# Altium PCB DGCtrl.PcbDoc (part 2 of 3)
Units mm, origin at the board's own origin, x right, y up, seen from the top; angles counter-clockwise.
Board outline 197.61 x 87.2 mm, 2 copper layers (Top Layer, Bottom Layer); 304 components, 306 nets, 985 pads, 136 vias.
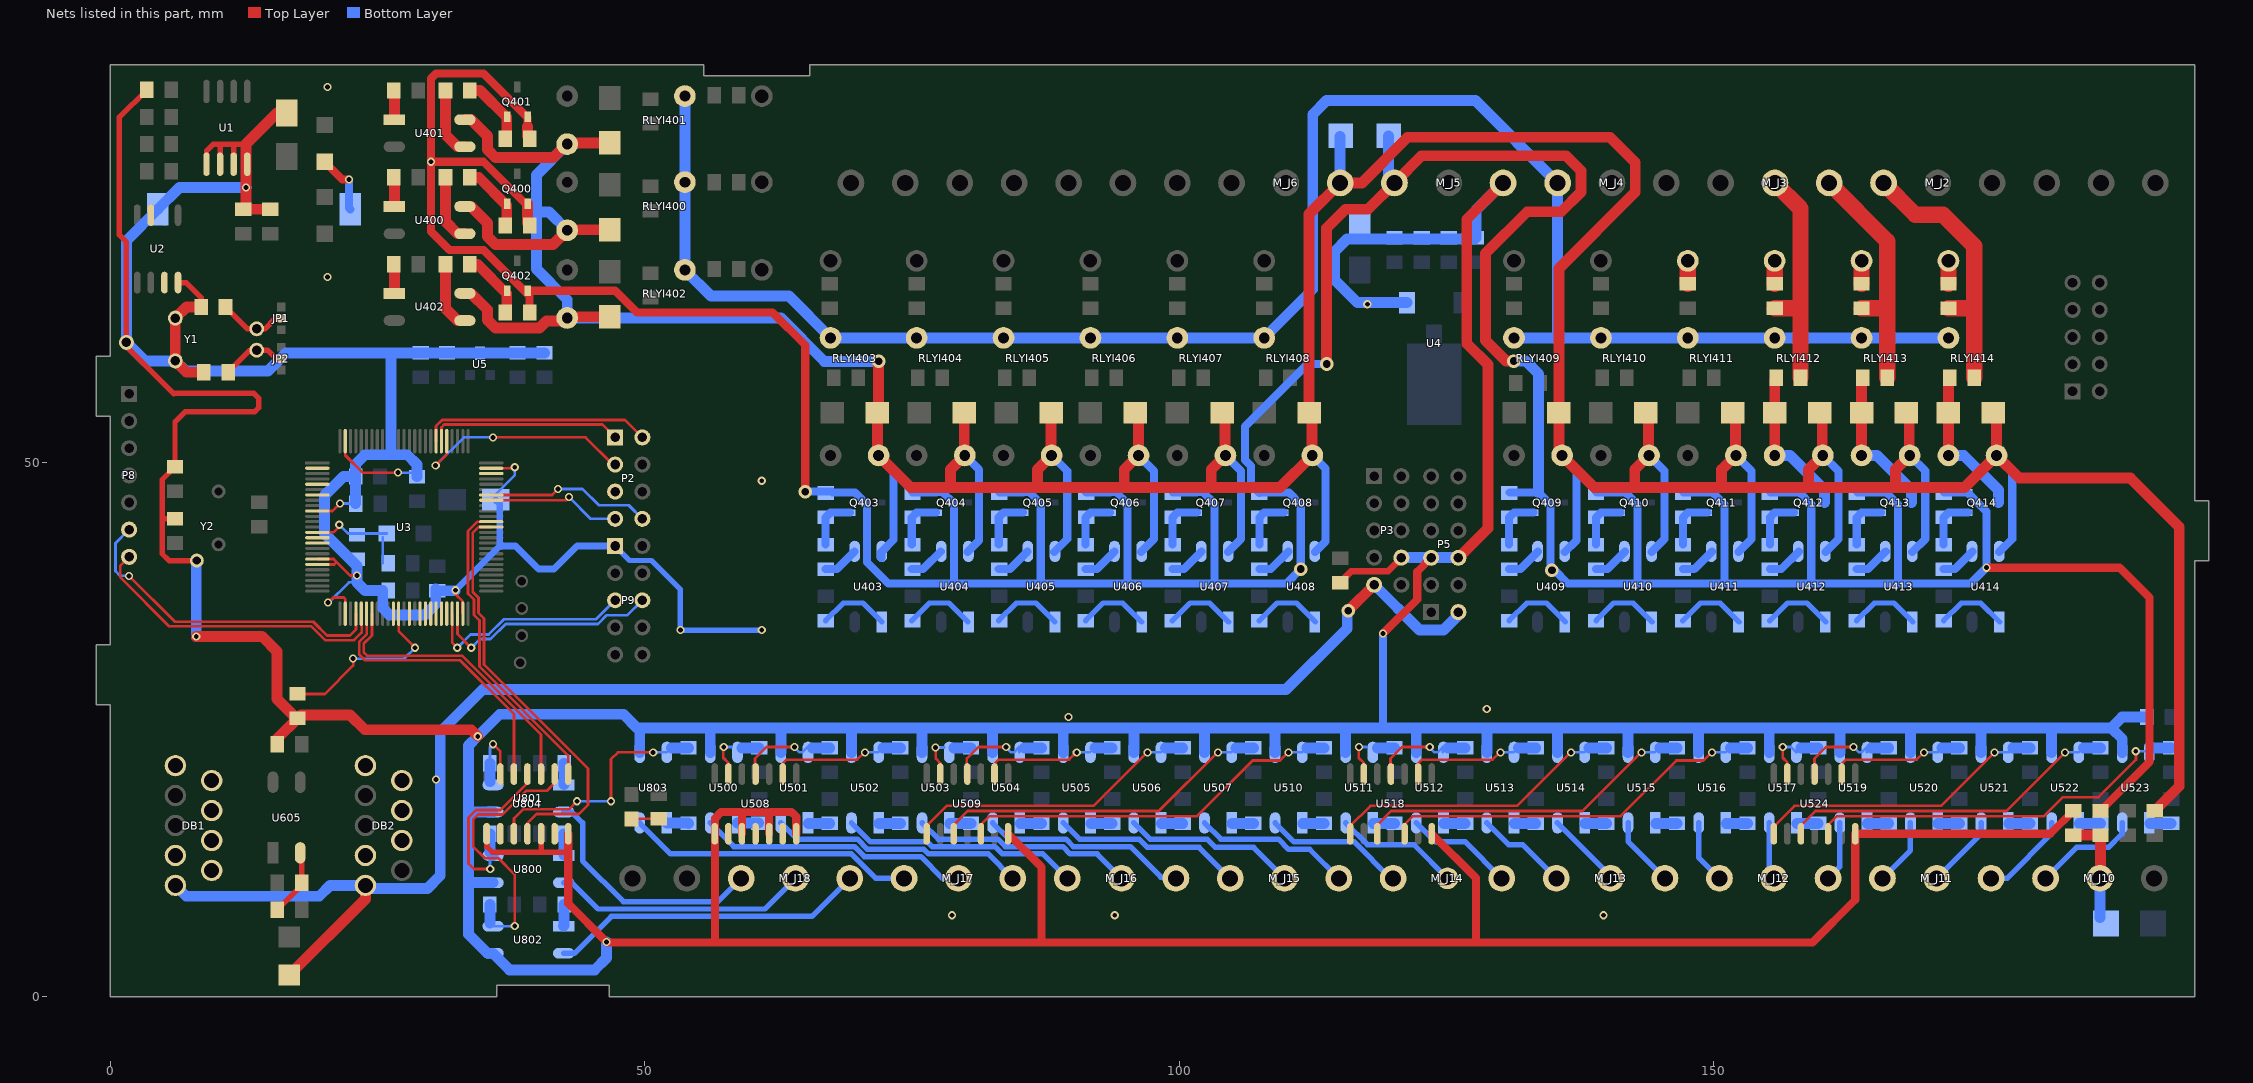
[diagram p2: the nets of this part, all layers, seen from the top]

## Via types
v1: diameter 0.762, hole 0.457, Top Layer to Bottom Layer, tented both sides, 126 vias
v2: diameter 1.27, hole 0.711, Top Layer to Bottom Layer, tented both sides, 10 vias

## Nets (pads, with @x,y where several pads share a name; then routed paths per layer and width w, separated by ;. In a path a pad name is that pad's centre, name@x,y a point inside that pad or via, vN(x,y) a via of type N, cw(c..) or ccw(c..) an arc to the next point about the centre after c; other vN are vias at no path point) (continued)
CTRL12_1: R-JP411.2 RLYI411.1 | length 2.2
  Top Layer w1.524: R-JP411.2@147.581,66.675 RLYI411.1@147.581,68.834
CTRL13: M_J3.2 P-JP412.1 R-JP412.1 | length 21.7
  Top Layer w1.524: R-JP412.1@155.709,64.389 157.995,64.389 158.122,64.262 ; M_J3.2@155.728,76.122 158.122,73.728 158.122,64.262 ; P-JP412.1@158.122,57.912 158.122,64.262
CTRL13_0: D412.1 P-JP412.2 Q412.3 RLYI412.4 | length 14.5
  Top Layer w1.016: RLYI412.4@155.709,50.634 D412.1@155.709,54.61 155.709,57.785 P-JP412.2@155.836,57.912
  Bottom Layer w1.016: RLYI412.4@155.709,50.634 157.138,50.634 160.379,47.393 Q412.3@160.379,46.228
CTRL13_1: R-JP412.2 RLYI412.1 | length 2.2
  Top Layer w1.524: R-JP412.2@155.709,66.675 RLYI412.1@155.709,68.834
CTRL14: M_J3.1 P-JP413.1 R-JP413.1 | length 22.9
  Top Layer w1.524: M_J3.1@160.808,76.122 166.25,70.68 166.25,64.389 ; R-JP413.1@163.837,64.389 166.25,64.389 ; P-JP413.1@166.25,57.912 166.25,64.389
CTRL14_0: D413.1 P-JP413.2 Q413.3 RLYI413.4 | length 14.5
  Top Layer w1.016: RLYI413.4@163.837,50.634 D413.1@163.837,54.61 163.837,57.785 P-JP413.2@163.964,57.912
  Bottom Layer w1.016: RLYI413.4@163.837,50.634 165.266,50.634 168.507,47.393 Q413.3@168.507,46.228
CTRL14_1: R-JP413.2 RLYI413.1 | length 2.2
  Top Layer w1.524: R-JP413.2@163.837,66.675 RLYI413.1@163.837,68.834
CTRL15: M_J2.3 P-JP414.1 R-JP414.1 | length 25.7
  Top Layer w1.524: M_J2.3@165.888,76.122 168.858,73.152 171.457,73.152 174.378,70.231 174.378,64.389 ; R-JP414.1@171.965,64.389 174.378,64.389 ; P-JP414.1@174.378,57.912 174.378,64.389
CTRL15_0: D414.1 P-JP414.2 Q414.3 RLYI414.4 | length 14.5
  Top Layer w1.016: RLYI414.4@171.965,50.634 D414.1@171.965,54.61 171.965,57.785 P-JP414.2@172.092,57.912
  Bottom Layer w1.016: RLYI414.4@171.965,50.634 173.394,50.634 176.635,47.393 Q414.3@176.635,46.228
CTRL15_1: R-JP414.2 RLYI414.1 | length 2.2
  Top Layer w1.524: R-JP414.2@171.965,66.675 RLYI414.1@171.965,68.834
CTRL_COM: M_J4.3 RLYI400.2 RLYI401.2 RLYI402.2 RLYI403.2 RLYI404.2 RLYI405.2 RLYI406.2 RLYI407.2 RLYI408.2 RLYI409.2 RLYI410.2 RLYI411.2 RLYI412.2 RLYI413.2 RLYI414.2 | length 177.6
  Bottom Layer w1.016: RLYI401.2@53.76,84.249 RLYI400.2@53.76,76.193 RLYI402.2@53.76,67.993 56.221,65.532 63.491,65.532 RLYI403.2@67.389,61.634 RLYI404.2@75.445,61.634 RLYI405.2@83.573,61.634 RLYI406.2@91.701,61.634 RLYI407.2@99.829,61.634 RLYI408.2@107.957,61.634 112.497,66.174 112.497,82.525 113.792,83.82 127.71,83.82 M_J4.3@135.408,76.122 135.407,61.634 ; RLYI409.2@131.325,61.634 RLYI410.2@139.453,61.634 RLYI411.2@147.581,61.634 RLYI412.2@155.709,61.634 RLYI413.2@163.837,61.634 RLYI414.2@171.965,61.634
DAC1: P8.6 U3.29 | length 31.1
  Top Layer w0.254: v1(1.778,39.37) 6.071,35.077 18.999,35.077 20.295,33.782 22.428,33.782 22.993,34.347 U3.29@22.993,35.83
  Bottom Layer w0.254: v1(1.778,39.37) 0.94,39.37 0.508,39.802 0.508,42.418 P8.6@1.778,43.688
DAC2: P8.7 U3.30 | length 29.4
  Top Layer w0.254: P8.7@1.778,41.148 0.94,40.31 0.94,39.243 1.092,39.091 1.092,39.086 5.533,34.646 18.82,34.646 20.116,33.35 22.809,33.35 23.53,34.071 23.53,35.794 U3.30@23.493,35.83
DI1: M_J17.2 U500.2 | length 25.4
  Bottom Layer w0.508: U500.2@56.141,16.256 58.351,14.046 69.619,14.046 70.559,13.106 75.84,13.106 77.872,11.074 M_J17.2@79.35,11.074
DI2: M_J17.3 U501.2 | length 23.8
  Bottom Layer w0.508: U501.2@62.745,16.256 64.269,14.732 69.903,14.732 70.843,13.792 76.124,13.792 76.556,13.36 82.144,13.36 M_J17.3@84.43,11.074
DI3: M_J16.1 U502.2 | length 22.3
  Bottom Layer w0.508: U502.2@69.349,16.256 71.127,14.478 76.454,14.478 76.886,14.046 82.774,14.046 83.46,13.36 87.249,13.36 M_J16.1@89.535,11.074
DI4: M_J16.2 U503.2 | length 20.8
  Bottom Layer w0.508: U503.2@75.953,16.256 77.477,14.732 83.058,14.732 83.744,14.046 89.124,14.046 89.81,13.36 92.329,13.36 M_J16.2@94.615,11.074
DI5: M_J16.3 U504.2 | length 19.3
  Bottom Layer w0.508: U504.2@82.557,16.256 84.081,14.732 89.408,14.732 90.094,14.046 95.428,14.046 98.298,11.176 99.594,11.176 M_J16.3@99.695,11.074
DI6: M_J15.1 U505.2 | length 17.8
  Bottom Layer w0.508: U505.2@89.161,16.256 90.685,14.732 96.266,14.732 97.028,13.97 101.88,13.97 M_J15.1@104.775,11.074
DI7: M_J15.2 U506.2 | length 16.2
  Bottom Layer w0.508: U506.2@95.765,16.256 97.289,14.732 102.616,14.732 103.378,13.97 106.96,13.97 M_J15.2@109.855,11.074
DI8: M_J15.3 U507.2 | length 14.7
  Bottom Layer w0.508: U507.2@102.369,16.256 103.893,14.732 109.296,14.732 110.236,13.792 112.218,13.792 M_J15.3@114.935,11.074
DI9: M_J14.1 U510.2 | length 13.2
  Bottom Layer w0.508: U510.2@108.973,16.256 110.751,14.478 116.385,14.478 119.789,11.074 M_J14.1@120.015,11.074
DI10: M_J14.2 U511.2 | length 11.7
  Bottom Layer w0.508: U511.2@115.577,16.256 117.609,14.224 121.946,14.224 M_J14.2@125.095,11.074
DI11: M_J14.3 U512.2 | length 10.1
  Bottom Layer w0.508: U512.2@122.181,16.256 123.959,14.478 126.772,14.478 M_J14.3@130.175,11.074
DI12: M_J13.1 U513.2 | length 8.6
  Bottom Layer w0.508: U513.2@128.785,16.256 130.817,14.224 132.131,14.224 M_J13.1@135.281,11.074
DI13: M_J13.2 U514.2 | length 7.2
  Bottom Layer w0.508: U514.2@135.389,16.256 140.361,11.284 M_J13.2@140.361,11.074
DI14: M_J13.3 U515.2 | length 6.6
  Bottom Layer w0.508: U515.2@141.993,16.256 141.993,14.522 M_J13.3@145.441,11.074
DI15: M_J12.1 U516.2 | length 6
  Bottom Layer w0.508: U516.2@148.597,16.256 148.597,13.024 M_J12.1@150.546,11.074
DI16: M_J12.2 U517.2 | length 5.4
  Bottom Layer w0.508: U517.2@155.201,16.256 155.201,11.5 M_J12.2@155.626,11.074
DI17: M_J12.3 U519.2 | length 5.6
  Bottom Layer w0.508: M_J12.3@160.706,11.074 161.805,12.173 U519.2@161.805,16.256
DI18: M_J11.1 U520.2 | length 6.3
  Bottom Layer w0.508: M_J11.1@165.786,11.074 168.409,13.697 U520.2@168.409,16.256
DI19: M_J11.2 U521.2 | length 6.9
  Bottom Layer w0.508: M_J11.2@170.866,11.074 175.013,15.221 U521.2@175.013,16.256
DI20: M_J11.3 U522.2 | length 8.4
  Bottom Layer w0.508: M_J11.3@175.946,11.074 177.444,11.074 181.617,15.247 U522.2@181.617,16.256
DI21: M_J10.1 U523.2 | length 9.9
  Bottom Layer w0.508: M_J10.1@181.052,11.074 183.947,13.97 186.944,13.97 188.221,15.247 U523.2@188.221,16.256
DIRECTION_1: U3.32 U804.10 | length 27.4
  Top Layer w0.254: U3.32@24.493,35.83 24.493,33.79 23.724,33.02 23.724,32.213 24.034,31.903 32.916,31.903 40.311,24.507 U804.10@40.311,20.828
DIRECTION_2: U3.64 U804.8 | length 29.2
  Top Layer w0.254: U3.64@35.651,44.436 34.352,44.436 33.477,43.562 33.477,37.702 34.036,37.143 34.036,35.711 34.544,35.203 34.544,30.885 42.851,22.578 U804.8@42.851,20.828
ENCA1_IN: M_J18.2 U800.2 | length 23.9
  Bottom Layer w0.508: U800.2@42.425,10.668 43.18,10.668 45.644,8.204 61.24,8.204 M_J18.2@64.11,11.074
ENCA2_IN: M_J18.3 U802.2 | length 29.7
  Bottom Layer w0.508: U802.2@42.425,4.064 43.434,4.064 46.888,7.518 65.634,7.518 M_J18.3@69.19,11.074
ENCB1_IN: M_J18.1 U801.2 | length 23.1
  Bottom Layer w0.508: U801.2@42.425,17.272 43.18,17.272 44.196,16.256 44.196,12.7 48.006,8.89 56.846,8.89 M_J18.1@59.03,11.074
ENCB2_IN: M_J17.1 U803.2 | length 26.9
  Bottom Layer w0.508: U803.2@49.537,16.256 52.432,13.36 69.335,13.36 71.621,11.074 M_J17.1@74.27,11.074
EX_GND: D415.1 JP401.1 M_J5.3 Q400.2 Q401.2 Q402.2 Q403.2 Q404.2 Q405.2 Q406.2 Q407.2 Q408.2 Q409.2 Q410.2 Q411.2 Q412.2 Q413.2 Q414.2 R412.1 R413.1 R414.1 R415.1 R416.1 R417.1 R430.1 R431.1 R432.1 R433.1 R434.1 R435.1 R442.1 R443.1 R444.1 | length 452.9
  Top Layer w0.762: Q402.2@39.05,66.044 47.24,66.044 49.276,64.008 61.976,64.008 65.024,60.96 v2(65.024,47.244) ; Q400.2@39.05,74.172 38.866,74.172 34.934,78.105 v1(30.023,78.105) ; 39.05,81.409 39.05,82.235 34.925,86.36 30.48,86.36 30.023,85.903 v1(30.023,78.105) ; R414.1@39.243,64.008 39.243,65.541 34.944,69.84 31.76,69.84 30.023,71.577 v1(30.023,78.105) ; v2@134.645,39.903 v2(134.874,39.903) ; v1(175.514,40.132) 187.96,40.132 190.754,37.338 190.754,21.971 JP401.1@186.182,17.399
  Top Layer w1.016: R412.1@39.05,72.39 Q400.2@39.05,74.172 ; R413.1@39.05,80.518 39.05,81.409 ; v2(113.792,59.182) 113.792,71.882 115.57,73.66 117.68,73.66 M_J5.3@120.142,76.122 122.684,78.664 136.195,78.664 137.592,77.267 137.592,75.273 135.75,73.431 132.563,73.431 128.67,69.538 128.67,61.373 130.581,59.461 v2(131.293,59.461)
  Bottom Layer w0.762: v2(65.024,47.244) 67.498,47.244 67.564,47.178 Q403.2@69.212,47.178 69.694,47.178 70.811,46.061 70.811,40.64 72.792,38.659 110.033,38.659 v2(111.379,40.005) 111.379,46.061 110.262,47.178 Q408.2@109.725,47.178 R432.1@107.564,47.178 ; R416.1@75.052,47.178 Q404.2@77.268,47.178 ; Q404.2@77.274,47.239 77.811,47.239 78.928,46.122 78.928,38.72 ; R417.1@83.18,47.178 Q405.2@85.396,47.178 ; Q405.2@85.402,47.239 85.939,47.239 87.056,46.122 87.056,38.72 ; R430.1@91.308,47.178 Q406.2@93.524,47.178 ; Q406.2@93.53,47.239 94.067,47.239 95.184,46.122 95.184,38.72 ; R431.1@99.436,47.178 Q407.2@101.622,47.178 Q407.2@101.652,47.178 ; Q407.2@101.658,47.239 102.195,47.239 103.312,46.122 103.312,38.72 ; R432.1@107.503,47.117 106.731,47.889 106.731,49.633 106.172,50.192 106.172,53.34 112.014,59.182 v2(113.792,59.182) ; R433.1@130.932,47.178 Q409.2@133.093,47.178 133.63,47.178 134.747,46.061 134.747,40.03 v2(134.874,39.903) 135.103,39.903 136.347,38.659 142.875,38.659 ; R434.1@139.06,47.178 Q410.2@141.221,47.178 141.758,47.178 142.875,46.061 142.875,38.659 ; R435.1@147.188,47.178 Q411.2@149.349,47.178 149.886,47.178 151.003,46.061 151.003,38.659 ; R442.1@155.316,47.178 Q412.2@157.477,47.178 158.014,47.178 159.131,46.061 159.131,38.659 ; R443.1@163.444,47.178 Q413.2@165.605,47.178 166.142,47.178 167.259,46.061 167.259,38.659 ; R444.1@171.572,47.178 Q414.2@173.733,47.178 175.514,45.397 v1(175.514,40.132) 174.041,38.659 167.259,38.659 ; 142.875,38.659 151.003,38.659 ; 151.003,38.659 159.131,38.659 ; 159.131,38.659 167.259,38.659
  Bottom Layer w1.016: D415.1@119.598,80.518 119.598,76.666 M_J5.3@120.142,76.122 ; v2(131.293,59.461) 132.436,59.461 133.63,58.267 133.63,47.178
EX_V+: D400.2 D401.2 D402.2 D403.2 D404.2 D405.2 D406.2 D407.2 D408.2 D409.2 D410.2 D411.2 D412.2 D413.2 D414.2 D415.2 JP400.1 M_J6.1 RLYI400.3 RLYI401.3 RLYI402.3 RLYI403.3 RLYI404.3 RLYI405.3 RLYI406.3 RLYI407.3 RLYI408.3 RLYI409.3 RLYI410.3 RLYI411.3 RLYI412.3 RLYI413.3 RLYI414.3 U400.4 U401.4 U402.4 U403.4 U404.4 U405.4 U406.4 U407.4 U408.4 U409.4 U410.4 U411.4 U412.4 U413.4 U414.4 | length 515.9
  Top Layer w1.016: U402.4@33.188,65.789 33.772,65.789 35.306,64.255 35.306,63.292 36.038,62.56 40.162,62.56 40.822,63.221 42.139,63.221 42.483,63.565 42.76,63.565 42.806,63.611 D402.2@46.736,63.611 ; U400.4@33.188,73.917 33.772,73.917 35.306,72.383 35.306,71.113 36.061,70.358 41.425,70.358 RLYI400.3@42.76,71.693 42.806,71.739 D400.2@46.736,71.739 ; U401.4@33.188,82.045 33.772,82.045 35.306,80.511 35.306,79.241 36.061,78.486 41.425,78.486 42.806,79.867 D401.2@46.736,79.867 ; RLYI403.3@71.771,50.68 71.771,53.848 71.882,53.959 v2(71.882,59.436) ; RLYI403.3@71.889,50.634 74.898,47.625 109.448,47.625 RLYI408.3@112.457,50.634 ; 78.613,48.26 78.613,49.302 RLYI404.3@79.945,50.634 ; RLYI404.3@79.899,50.68 D404.2@79.899,54.61 ; 86.741,48.26 86.741,49.302 RLYI405.3@88.073,50.634 ; RLYI405.3@88.027,50.68 D405.2@88.027,54.61 ; 94.869,48.26 94.869,49.302 RLYI406.3@96.201,50.634 D406.2@96.201,54.31 ; 102.997,48.26 102.997,49.302 RLYI407.3@104.329,50.634 ; RLYI407.3@104.283,50.68 D407.2@104.283,54.61 ; D408.2@112.157,54.61 112.157,73.216 M_J6.1@115.062,76.122 117.092,76.122 121.361,80.391 140.31,80.391 142.672,78.029 142.672,75.273 135.525,68.126 D409.2@135.525,54.61 135.525,50.934 RLYI409.3@135.825,50.634 138.834,47.625 173.456,47.625 RLYI414.3@176.465,50.634 ; RLYI408.3@112.411,50.68 D408.2@112.411,54.61 ; 142.621,48.26 142.621,49.302 RLYI410.3@143.953,50.634 ; RLYI410.3@143.907,50.68 D410.2@143.907,54.61 ; 150.749,48.26 150.749,49.302 RLYI411.3@152.081,50.634 ; RLYI411.3@152.035,50.68 D411.2@152.035,54.61 ; 158.877,48.26 158.877,49.302 RLYI412.3@160.209,50.634 ; RLYI412.3@160.163,50.68 D412.2@160.163,54.61 ; 167.005,48.26 167.005,49.302 RLYI413.3@168.337,50.634 ; RLYI413.3@168.291,50.68 D413.2@168.291,54.61 ; D414.2@176.465,54.31 RLYI414.3@176.465,50.634 ; JP400.1@191.262,17.399 193.548,19.685 193.548,43.942 188.976,48.514 178.585,48.514 RLYI414.3@176.465,50.634
  Bottom Layer w0.762: RLYI403.3@71.889,50.634 73.279,49.244 73.279,42.746 U403.4@72.185,41.652 72.133,41.6 U403.4@72.133,41.062 ; RLYI404.3@79.945,50.634 81.28,49.299 81.28,42.691 U404.4@80.189,41.6 ; RLYI405.3@88.073,50.634 89.535,49.172 89.535,42.818 U405.4@88.317,41.6 ; RLYI406.3@96.201,50.634 97.663,49.172 97.663,42.818 U406.4@96.445,41.6 ; RLYI407.3@104.329,50.634 105.791,49.172 105.791,42.818 U407.4@104.573,41.6 ; RLYI408.3@112.457,50.634 113.693,49.397 113.693,42.592 U408.4@112.701,41.6 ; RLYI409.3@135.825,50.634 137.16,49.299 137.16,42.691 U409.4@136.069,41.6 ; RLYI410.3@143.953,50.634 145.415,49.172 145.415,42.818 U410.4@144.197,41.6 ; RLYI411.3@152.081,50.634 153.543,49.172 153.543,42.818 U411.4@152.325,41.6 ; RLYI412.3@160.209,50.634 161.671,49.172 161.671,42.818 U412.4@160.453,41.6 ; RLYI413.3@168.337,50.634 169.799,49.172 169.799,42.818 U413.4@168.581,41.6 ; RLYI414.3@176.465,50.634 177.927,49.172 177.927,42.818 U414.4@176.709,41.6
  Bottom Layer w1.016: RLYI400.3@42.76,71.693 41.047,73.406 39.878,73.406 ; RLYI401.3@42.76,79.749 39.878,76.867 39.878,73.406 ; v2(71.882,59.436) 66.802,59.436 62.745,63.493 RLYI402.3@42.76,63.493 42.76,65.19 39.878,68.072 39.878,73.406 ; M_J6.1@115.062,76.122 D415.2@115.062,80.482
GND_COMM: DB1.5 DB2.5 P3.9 P5.2 S600.1 | length 155.5
  Top Layer w1.016: S600.1@16.764,2.032 23.883,9.151 DB2.5@23.883,10.414 ; v2(115.824,36.112) P3.9@118.244,38.532
  Bottom Layer w1.016: DB1.5@6.103,10.414 7.119,9.398 19.558,9.398 20.574,10.414 DB2.5@23.883,10.414 24.169,10.128 29.686,10.128 30.886,11.328 30.886,24.76 34.854,28.727 110.007,28.727 115.729,34.449 115.729,36.017 v2(115.824,36.112) ; P3.9@118.244,38.532 122.486,34.29 124.714,34.29 126.118,35.694 P5.2@126.118,35.979
  other v1: 30.48,20.32
GNDDIDO: D4.1 JP3.2 JP401.2 M_J10.2 | length 10.3
  Top Layer w1.016: JP3.2@183.642,15.113 JP401.2@186.182,15.113 186.182,11.125 M_J10.2@186.132,11.074
  Bottom Layer w1.016: D4.1@186.132,7.416 M_J10.2@186.132,11.074
  other v1: 78.74,7.62 93.98,7.62 139.7,7.62
GNDMCU: C1.2 C2.1 C3.2 C4.2 C5.2 C6.2 C7.1 C8.2 C9.2 C10.1 C11.2 C12.2 C13.2 C14.1 C15.1 C16.2 C17.2 C18.1 C19.2 C20.1 C21.2 C500.2 C800.2 EB1.2 ED1.2 ED2.2 ED3.2 JP3.1 M_J5.1 P3.8 P5.5 P5.6 P9.1 R2.1 R610.2 U1.1 U1.2 U1.3 U1.4 U2.4 U3.10 U3.19 U3.20 U3.27 U3.49 U3.74 U3.99 U4.1 U5.3 U500.3 U501.3 U502.3 U503.3 U504.3 U505.3 U506.3 U507.3 U508.1 U508.3 U508.5 U508.7 U509.7 U510.3 U511.3 U512.3 U513.3 U514.3 U515.3 U516.3 U517.3 U518.7 U519.3 U520.3 U521.3 U522.3 U523.3 U524.7 U800.3 U801.3 U802.3 U803.3 U804.1 U804.5 U804.7 Y1.3 Y1.4 Y1.5 Y2.3 | length 893.7
  Top Layer w0.254: U3.20@19.387,40.436 20.955,40.436 21.184,40.665 ; U3.19@19.387,40.936 20.913,40.936 21.184,40.665 ; U3.10@19.387,45.436 20.798,45.436 v1(21.488,46.126) ; v1(20.396,36.881) 20.853,37.338 21.844,37.338 21.993,37.189 U3.27@21.993,35.83 ; U3.99@21.993,51.967 21.993,50.651 23.622,49.022 v1(26.924,49.022) ; v1(23.089,39.395) 22.454,39.395 21.184,40.665 ; v1(32.309,38.024) 32.309,37.649 32.944,37.014 32.944,35.879 U3.49@32.993,35.83 ; U3.74@35.651,49.436 37.752,49.436 v1(37.846,49.53)
  Top Layer w0.508: C2.1@3.429,84.836 0.864,82.271 0.864,71.259 1.524,70.599 Y1.3@1.524,61.207 1.524,60.833 5.948,56.409 5.978,56.439 13.462,56.439 13.894,56.007 13.894,55.093 13.513,54.712 7.01,54.712 6.071,53.772 C20.1@6.071,49.555 4.877,48.362 4.877,44.755 ; C21.2@6.071,44.729 4.902,44.729 4.877,44.755 ; U2.4@6.35,66.802 7.112,66.802 8.509,65.405 C9.2@8.509,64.516 ; Y2.3@8.109,40.792 5.518,40.792 4.877,41.433 4.877,44.755 ; U1.1@9.017,77.88 9.017,79.121 9.652,79.756 10.414,79.756 ; U1.2@10.287,77.88 10.287,79.629 10.414,79.756 ; U1.3@11.557,77.88 11.557,79.629 11.43,79.756 ; 12.7,79.756 11.43,79.756 ; U804.1@35.231,15.24 35.231,14.045 35.763,13.513 40.311,13.513 ; U804.5@40.311,15.24 40.311,13.513 ; 42.672,13.513 40.311,13.513 ; P3.8@120.784,41.028 P3.8@120.784,41.072 ; 10.414,79.756 11.43,79.756
  Top Layer w0.635: C500.2@115.062,38.735 116.129,39.802 119.558,39.802 P3.8@120.784,41.028
  Top Layer w0.762: U804.7@42.851,15.24 42.851,8.711 v1(46.431,5.131) 46.482,5.08 56.566,5.08 ; U508.3@59.106,15.24 59.106,17.094 ; U508.5@61.646,15.24 61.646,17.094 ; U508.7@64.186,15.24 64.186,16.84 63.754,17.272 57.15,17.272 56.566,16.688 U508.1@56.566,15.24 56.566,5.08 ; U509.7@83.998,15.24 87.122,12.116 87.122,5.08 ; v1(119.075,33.96) 122.269,37.154 122.269,39.75 P5.5@123.578,41.059 ; U518.7@123.622,15.24 127.762,11.1 127.762,5.08 ; JP3.1@183.642,17.399 181.483,15.24 U524.7@163.246,15.24 163.246,9.068 159.258,5.08 127.762,5.08 ; 56.566,5.08 87.122,5.08 ; 87.122,5.08 127.762,5.08
  Top Layer w1.016: v1(8.052,33.68) 14.224,33.68 15.621,32.283 15.621,27.859 17.445,26.035 R2.1@17.526,26.035 ; C9.2@8.509,64.516 7.135,64.516 Y1.5@6.096,63.477 Y1.4@6.096,59.477 7.153,58.42 C10.1@8.763,58.42 ; 12.7,79.502 v1(12.7,75.692) 12.7,73.914 C1.2@12.446,73.66 C12.2@14.986,73.66 ; 12.7,79.756 15.617,82.673 ED1.2@16.51,82.673 ; R610.2@15.621,23.622 15.621,24.13 R2.1@17.526,26.035 ; v1(34.392,24.359) 33.782,24.968 23.851,24.968 22.454,26.365 17.856,26.365 R2.1@17.526,26.035 ; P5.6@126.118,41.059 128.88,43.821 128.88,59.131 126.898,61.112 126.898,72.718 M_J5.1@130.302,76.122
  Bottom Layer w0.254: v1(20.396,36.881) 20.452,36.881 22.331,38.76 23.089,38.76 ; v1(21.488,46.126) 22.955,46.126 C4.2@22.962,46.133 ; v1(26.924,49.022) 28.321,49.022 C8.2@28.702,48.641 ; C11.2@30.455,38.125 C11.2@30.531,38.202 ; ED2.2@36.068,46.99 37.846,48.768 v1(37.846,49.53)
  Bottom Layer w0.508: P9.1@47.244,42.164 48.602,40.806 50.634,40.806 53.34,38.1 v1(53.34,34.29) v1(60.96,34.29)
  Bottom Layer w0.635: v1(32.309,38.024) 36.449,42.164 ; ED2.2@36.068,46.482 36.449,46.101 36.449,42.164 ; P9.1@47.244,42.164 43.688,42.164 41.529,40.005 40.088,40.005 37.929,42.164 36.449,42.164
  Bottom Layer w0.762: 118.923,25.146 119.075,25.298 v1(119.075,33.96)
  Bottom Layer w1.016: v1(8.052,33.68) 8.052,40.735 Y2.3@8.109,40.792 ; v1(12.7,75.692) 6.494,75.692 EB1.2@4.462,73.66 1.524,70.722 Y1.3@1.524,61.207 3.254,59.477 Y1.4@6.096,59.477 7.052,58.522 14.757,58.522 16.459,60.223 26.391,60.223 ; C4.2@22.962,46.133 C3.2@22.962,48.666 ; C8.2@28.702,48.641 28.702,49.784 27.788,50.698 26.391,50.698 ; C11.2@30.455,38.125 30.455,36.728 29.439,35.712 26.137,35.712 25.502,36.347 25.502,37.998 23.851,37.998 23.089,38.76 v1(23.089,39.395) 23.089,40.284 20.041,43.332 20.041,46.888 21.819,48.666 C3.2@22.962,48.666 ; C11.2@30.607,37.973 v1@32.258,37.973 ; U800.3@35.825,10.668 33.528,10.668 ; U801.3@35.825,17.272 33.528,17.272 ; C15.1@40.64,60.223 C16.2@38.1,60.223 26.391,60.223 ; v1(46.431,5.131) 46.431,3.607 45.339,2.515 37.374,2.515 U802.3@35.825,4.064 35.306,4.064 33.528,5.842 33.528,10.668 ; U803.3@49.537,22.856 49.537,25.139 ; U500.3@56.141,22.856 56.141,24.899 ; U501.3@62.745,22.856 62.745,25.139 ; U502.3@69.349,22.856 69.349,25.139 ; U503.3@75.953,22.856 75.953,24.899 ; U504.3@82.557,22.856 82.557,25.139 ; U505.3@89.161,22.856 89.161,25.139 ; U506.3@95.765,22.856 95.765,24.899 ; U507.3@102.369,22.856 102.369,24.885 ; U510.3@108.973,22.856 108.973,24.899 ; U511.3@115.577,22.856 115.577,25.139 ; P3.8@120.784,41.072 P5.6@126.105,41.072 ; U4.1@121.317,64.922 116.688,64.922 114.554,67.056 114.554,69.703 115.717,70.866 C7.1@127.635,70.866 ; U512.3@122.181,22.856 122.181,25.139 ; C7.1@127.762,70.993 127.762,73.582 M_J5.1@130.302,76.122 ; U513.3@128.785,22.856 128.785,25.139 ; U514.3@135.389,22.856 135.389,25.139 ; U515.3@141.993,22.856 141.993,24.899 ; U516.3@148.597,22.856 148.597,24.885 ; U517.3@155.201,22.856 155.201,25.139 ; U519.3@161.805,22.856 161.805,25.139 ; U520.3@168.409,22.856 168.409,24.885 ; U521.3@175.013,22.856 175.013,25.139 ; U522.3@181.617,22.856 181.617,25.139 ; U523.3@188.221,22.856 188.221,24.123 187.198,25.146 ; C800.2@190.5,26.162 188.214,26.162 187.198,25.146 ; C3.2@22.962,48.666 22.962,49.809 23.851,50.698 26.391,50.698 ; 26.391,50.698 26.289,50.8 26.289,60.122 26.391,60.223 ; 33.528,10.668 33.528,17.272 ; 33.528,17.272 33.528,23.495 v1(34.392,24.359) 36.449,26.416 48.013,26.416 49.283,25.146 118.923,25.146 187.198,25.146
  other v1: 89.662,26.162 128.778,26.924 60.96,48.26 117.602,64.77 20.32,67.31 20.32,85.09
LED_CS: P2.2 U3.82 | length 21.6
  Top Layer w0.254: U3.82@30.493,51.967 30.493,53.376 31.067,53.95 48.158,53.95 P2.2@49.784,52.324
LED_DAT: P2.1 U3.81 | length 18.1
  Top Layer w0.254: U3.81@30.993,51.967 30.993,53.265 31.246,53.518 46.05,53.518 P2.1@47.244,52.324
LED_SCK: P2.3 U3.80 | length 21.7
  Top Layer w0.254: v1(30.455,49.682) 31.493,50.721 U3.80@31.493,51.967 ; v1(35.814,52.324) 44.475,52.324 47.015,49.784 P2.3@47.244,49.784
  Bottom Layer w0.254: v1(30.455,49.682) 33.096,52.324 v1(35.814,52.324)
LSEI: C10.2 JP2.2 Y1.2 | length 6.1
  Top Layer w0.508: C10.2@11.049,58.42 13.106,60.477 Y1.2@13.716,60.477 14.707,60.477 15.494,59.69 JP2.2@16.002,59.69
LSEO: C9.1 JP1.2 Y1.1 | length 6.5
  Top Layer w0.508: C9.1@10.795,64.516 12.834,62.477 Y1.1@13.716,62.477 14.471,62.477 15.443,63.449 JP1.2@16.002,63.449
MCU_RXD_A: P2.8 U3.69 | length 15.5
  Top Layer w0.254: U3.69@35.651,46.936 41.348,46.936 v1(41.91,47.498)
  Bottom Layer w0.254: v1(41.91,47.498) 44.196,47.498 45.72,45.974 48.514,45.974 P2.8@49.784,44.704
MCU_RXD_B: P9.6 U3.48 | length 21.6
  Top Layer w0.254: U3.48@32.493,35.83 32.493,33.928 v1(33.782,32.639)
  Bottom Layer w0.254: v1(33.782,32.639) 34.595,33.452 35.586,33.452 37.009,34.874 45.645,34.874 46.458,35.687 48.387,35.687 P9.6@49.784,37.084
MCU_TXD_A: P2.7 U3.68 | length 12.6
  Top Layer w0.254: U3.68@35.651,46.436 42.626,46.436 v1(42.926,46.736)
  Bottom Layer w0.254: v1(42.926,46.736) 44.958,44.704 P2.7@47.244,44.704
MCU_TXD_B: P9.5 U3.47 | length 20.1
  Top Layer w0.254: U3.47@31.993,35.83 31.993,33.114 v1(32.468,32.639) ; v1@32.527,32.697 v1@32.585,32.639
  Bottom Layer w0.254: v1(32.468,32.639) 33.713,33.884 35.408,33.884 36.83,35.306 45.466,35.306 P9.5@47.244,37.084
N_PULSE_1: U3.31 U804.12 | length 26.5
  Top Layer w0.254: U3.31@23.993,35.83 23.993,33.9 23.292,33.199 23.292,32.034 23.855,31.471 32.737,31.471 37.771,26.437 U804.12@37.771,20.828
N_PULSE_2: U3.63 U804.4 | length 39.3
  Top Layer w0.254: U3.63@35.651,43.936 34.462,43.936 33.909,43.383 33.909,37.881 34.468,37.322 34.468,35.89 34.976,35.382 34.976,31.064 44.704,21.336 44.704,17.931 43.867,17.094 39.878,17.094 39.041,16.257 U804.4@39.041,15.24
NetD1_1: D1.1 EB1.1 | length 5.8
  Top Layer w0.762: D1.1@20.066,78.105 21.717,76.454 v1(22.352,76.454)
  Bottom Layer w0.762: v1(22.352,76.454) 22.352,73.77 EB1.1@22.462,73.66
NetDB1_1: DB1.1
NetDB1_4: DB1.4
NetDB1_6: DB1.6
NetDB1_7: DB1.7
NetDB1_8: DB1.8
NetDB1_9: DB1.9
NetDB2_1: DB2.1
NetDB2_4: DB2.4
NetDB2_6: DB2.6
NetDB2_7: DB2.7
NetDB2_8: DB2.8
NetLED1_1: LED1.1 R5.1 | length 2.5
  Top Layer w0.254: LED1.1@48.768,16.637 R5.1@51.308,16.637
NetP2_5: P2.5
NetQ400_1: Q400.1 R406.1 R412.2 | length 6.5
  Top Layer w1.016: R406.1@33.655,76.647 34.478,76.647 37.107,74.018 R412.2@37.107,72.047
NetQ401_1: Q401.1 R407.1 R413.2 | length 6.6
  Top Layer w1.016: R407.1@33.655,84.775 34.605,84.775 37.107,82.273 R413.2@37.107,80.175
NetQ402_1: Q402.1 R408.1 R414.2 | length 6.4
  Top Layer w1.016: R408.1@33.655,68.519 34.351,68.519 37.107,65.763 R414.2@37.107,63.919
NetQ403_1: Q403.1 R409.1 R415.2 | length 5
  Bottom Layer w0.762: R409.1@66.935,42.291 R415.2@66.935,44.831 67.382,45.278 Q403.1@69.212,45.278
NetQ404_1: Q404.1 R410.1 R416.2 | length 5
  Bottom Layer w0.762: R410.1@74.991,42.291 74.991,44.831 75.438,45.278 Q404.1@77.268,45.278
NetQ405_1: Q405.1 R411.1 R417.2 | length 5
  Bottom Layer w0.762: R411.1@83.119,42.291 83.119,44.831 83.566,45.278 Q405.1@85.396,45.278
NetQ406_1: Q406.1 R424.1 R430.2 | length 5
  Bottom Layer w0.762: R424.1@91.247,42.291 91.247,44.831 91.694,45.278 Q406.1@93.524,45.278
NetQ407_1: Q407.1 R425.1 R431.2 | length 5
  Bottom Layer w0.762: R425.1@99.375,42.291 99.375,44.831 99.822,45.278 Q407.1@101.652,45.278
NetQ408_1: Q408.1 R426.1 R432.2 | length 5
  Bottom Layer w0.762: R426.1@107.503,42.291 R432.2@107.503,44.831 107.95,45.278 Q408.1@109.78,45.278
NetQ409_1: Q409.1 R427.1 R433.2 | length 5
  Bottom Layer w0.762: R427.1@130.871,42.291 R433.2@130.871,44.831 131.318,45.278 Q409.1@133.148,45.278
NetQ410_1: Q410.1 R428.1 R434.2 | length 5
  Bottom Layer w0.762: R428.1@138.999,42.291 R434.2@138.999,44.831 139.446,45.278 Q410.1@141.276,45.278
NetQ411_1: Q411.1 R429.1 R435.2 | length 5
  Bottom Layer w0.762: R429.1@147.127,42.291 R435.2@147.127,44.831 147.574,45.278 Q411.1@149.404,45.278
NetQ412_1: Q412.1 R439.1 R442.2 | length 5
  Bottom Layer w0.762: R439.1@155.255,42.291 R442.2@155.255,44.831 155.702,45.278 Q412.1@157.532,45.278
NetQ413_1: Q413.1 R440.1 R443.2 | length 5
  Bottom Layer w0.762: R440.1@163.383,42.291 R443.2@163.383,44.831 163.83,45.278 Q413.1@165.66,45.278
NetQ414_1: Q414.1 R441.1 R444.2 | length 5
  Bottom Layer w0.762: R441.1@171.511,42.291 R444.2@171.511,44.831 171.958,45.278 Q414.1@173.788,45.278
NetR2_2: R2.2 U3.37 | length 17
  Top Layer w0.254: R2.2@17.526,28.321 20.091,28.321 22.733,30.963 v1(22.733,31.623) ; U3.37@26.993,35.83 26.993,34.221 28.528,32.686 v1(28.528,32.639)
  Bottom Layer w0.254: v1(22.733,31.623) 27.512,31.623 v1(28.528,32.639)
NetR400_2: R400.2 U400.1 | length 2.7
  Top Layer w1.016: U400.1@26.588,73.917 R400.2@26.588,76.603
NetR401_2: R401.2 U401.1 | length 2.7
  Top Layer w1.016: U401.1@26.588,82.045 R401.2@26.588,84.731
NetR402_2: R402.2 U402.1 | length 2.7
  Top Layer w1.016: U402.1@26.588,65.789 R402.2@26.588,68.475
NetR403_2: R403.2 U403.1 | length 6.7
  Bottom Layer w0.508: R403.2@66.935,35.179 68.586,36.83 70.407,36.83 U403.1@72.185,35.052
NetR404_2: R404.2 U404.1 | length 6.7
  Bottom Layer w0.508: R404.2@74.991,35.179 76.642,36.83 78.463,36.83 U404.1@80.241,35.052
NetR405_2: R405.2 U405.1 | length 6.7
  Bottom Layer w0.508: R405.2@83.119,35.179 84.77,36.83 86.591,36.83 U405.1@88.369,35.052
NetR406_2: R406.2 U400.3 | length 6.4
  Top Layer w1.016: R406.2@31.369,76.647 31.369,72.51 32.502,71.377 U400.3@33.188,71.377
NetR407_2: R407.2 U401.3 | length 6.4
  Top Layer w1.016: R407.2@31.369,84.775 31.369,80.638 32.502,79.505 U401.3@33.188,79.505
NetR408_2: R408.2 U402.3 | length 6.4
  Top Layer w1.016: R408.2@31.369,68.519 31.369,64.382 32.502,63.249 U402.3@33.188,63.249
NetR409_2: R409.2 U403.3 | length 3.4
  Bottom Layer w0.762: R409.2@66.935,40.005 67.998,40.005 U403.3@69.645,41.652
NetR410_2: R410.2 U404.3 | length 3.4
  Bottom Layer w0.762: R410.2@74.991,40.005 76.054,40.005 U404.3@77.701,41.652
NetR411_2: R411.2 U405.3 | length 3.4
  Bottom Layer w0.762: R411.2@83.119,40.005 84.182,40.005 U405.3@85.829,41.652
NetR418_2: R418.2 U406.1 | length 6.7
  Bottom Layer w0.508: R418.2@91.247,35.179 92.898,36.83 94.719,36.83 U406.1@96.497,35.052
NetR419_2: R419.2 U407.1 | length 6.7
  Bottom Layer w0.508: R419.2@99.375,35.179 101.026,36.83 102.847,36.83 U407.1@104.625,35.052
NetR420_2: R420.2 U408.1 | length 6.7
  Bottom Layer w0.508: R420.2@107.503,35.179 109.154,36.83 110.975,36.83 U408.1@112.753,35.052
NetR421_2: R421.2 U409.1 | length 6.7
  Bottom Layer w0.508: R421.2@130.871,35.179 132.522,36.83 134.343,36.83 U409.1@136.121,35.052
NetR422_2: R422.2 U410.1 | length 6.7
  Bottom Layer w0.508: R422.2@138.999,35.179 140.65,36.83 142.471,36.83 U410.1@144.249,35.052
NetR423_2: R423.2 U411.1 | length 6.7
  Bottom Layer w0.508: R423.2@147.127,35.179 148.778,36.83 150.599,36.83 U411.1@152.377,35.052
NetR424_2: R424.2 U406.3 | length 3.4
  Bottom Layer w0.762: R424.2@91.247,40.005 92.31,40.005 U406.3@93.957,41.652
NetR425_2: R425.2 U407.3 | length 3.4
  Bottom Layer w0.762: R425.2@99.375,40.005 100.438,40.005 U407.3@102.085,41.652
NetR426_2: R426.2 U408.3 | length 3.4
  Bottom Layer w0.762: R426.2@107.503,40.005 108.566,40.005 U408.3@110.213,41.652
NetR427_2: R427.2 U409.3 | length 3.4
  Bottom Layer w0.762: R427.2@130.871,40.005 131.934,40.005 U409.3@133.581,41.652
NetR428_2: R428.2 U410.3 | length 3.4
  Bottom Layer w0.762: R428.2@138.999,40.005 140.062,40.005 U410.3@141.709,41.652
NetR429_2: R429.2 U411.3 | length 3.4
  Bottom Layer w0.762: R429.2@147.127,40.005 148.19,40.005 U411.3@149.837,41.652
NetR436_2: R436.2 U412.1 | length 6.7
  Bottom Layer w0.508: R436.2@155.255,35.179 156.906,36.83 158.727,36.83 U412.1@160.505,35.052
NetR437_2: R437.2 U413.1 | length 6.7
  Bottom Layer w0.508: R437.2@163.383,35.179 165.034,36.83 166.855,36.83 U413.1@168.633,35.052
NetR438_2: R438.2 U414.1 | length 6.7
  Bottom Layer w0.508: R438.2@171.511,35.179 173.162,36.83 174.983,36.83 U414.1@176.761,35.052
NetR439_2: R439.2 U412.3 | length 3.4
  Bottom Layer w0.762: R439.2@155.255,40.005 156.318,40.005 U412.3@157.965,41.652
NetR440_2: R440.2 U413.3 | length 3.4
  Bottom Layer w0.762: R440.2@163.383,40.005 164.446,40.005 U413.3@166.093,41.652
NetR441_2: R441.2 U414.3 | length 3.4
  Bottom Layer w0.762: R441.2@171.511,40.005 172.574,40.005 U414.3@174.221,41.652
NetR500_1: R500.1 U500.1 | length 2
  Bottom Layer w1.016: U500.1@58.681,16.256 R500.1@60.668,16.256
NetR501_1: R501.1 U501.1 | length 2
  Bottom Layer w1.016: U501.1@65.329,16.211 R501.1@67.317,16.211
NetR502_1: R502.1 U502.1 | length 2
  Bottom Layer w1.016: U502.1@71.933,16.211 R502.1@73.921,16.211
NetR503_1: R503.1 U503.1 | length 2
  Bottom Layer w1.016: U503.1@78.537,16.211 R503.1@80.525,16.211
NetR504_1: R504.1 U504.1 | length 2
  Bottom Layer w1.016: U504.1@85.141,16.211 R504.1@87.129,16.211
NetR505_1: R505.1 U505.1 | length 2
  Bottom Layer w1.016: U505.1@91.745,16.211 R505.1@93.733,16.211
NetR506_1: R506.1 U506.1 | length 2
  Bottom Layer w1.016: U506.1@98.349,16.211 R506.1@100.337,16.211
NetR507_1: R507.1 U507.1 | length 2
  Bottom Layer w1.016: U507.1@104.953,16.211 R507.1@106.941,16.211
NetR509_1: R509.1 U500.4 U508.13 | length 5.1
  Top Layer w0.254: v1@57.353,23.368 57.353,22.352 57.836,21.869 U508.13@57.836,20.828
  Bottom Layer w0.254: v1@57.353,23.368 58.118,23.368
  Bottom Layer w1.016: U500.4@59.106,23.282 R509.1@60.713,23.282
  other v1: 57.404,23.368
NetR510_1: R510.1 U501.4 U508.11 | length 8.8
  Top Layer w0.254: U508.11@60.325,20.828 60.325,22.276 61.417,23.368 v1@63.957,23.368
  Bottom Layer w0.254: v1@63.957,23.368 64.469,22.856 64.728,22.856 U501.4@65.234,23.361
  Bottom Layer w1.016: U501.4@65.71,23.282 R510.1@67.317,23.282
  other v1: 64.008,23.368
NetR511_1: R511.1 U502.4 U508.9 | length 11
  Top Layer w0.254: U508.9@62.865,21.768 63.271,22.174 69.875,22.174 v1@70.561,22.86
  Bottom Layer w0.254: v1@70.565,22.856 U502.4@71.838,22.856
  Bottom Layer w1.016: U502.4@72.314,23.282 R511.1@73.921,23.282
  other v1: 70.612,22.86
NetR512_1: R512.1 U503.4 U509.13 | length 5.1
  Top Layer w0.254: v1@77.241,23.317 77.241,22.275 77.648,21.869 U509.13@77.648,20.828
  Bottom Layer w0.254: v1@77.241,23.317 U503.4@78.032,23.317
  Bottom Layer w1.016: U503.4@78.918,23.282 R512.1@80.525,23.282
  other v1: 77.216,23.317
NetR513_1: R513.1 U504.4 U509.11 | length 9.3
  Top Layer w0.254: U509.11@80.137,20.828 80.137,22.276 81.229,23.368 v1@83.769,23.368
  Bottom Layer w0.254: v1@83.769,23.368 84.281,22.856 84.54,22.856 85.046,23.361 U504.4@85.046,22.856
  Bottom Layer w1.016: U504.4@85.522,23.282 R513.1@87.129,23.282
  other v1: 83.82,23.368
NetR514_1: R514.1 U505.4 U509.9 | length 11
  Top Layer w0.254: U509.9@82.677,21.768 83.083,22.174 89.687,22.174 v1@90.373,22.86
  Bottom Layer w0.254: v1@90.373,22.86 90.377,22.856 U505.4@91.65,22.856
  Bottom Layer w1.016: U505.4@92.126,23.282 R514.1@93.733,23.282
  other v1: 90.424,22.86
NetR515_1: R515.1 U506.4 U509.1 | length 26.2
  Top Layer w0.254: U509.1@76.327,15.926 78.257,17.856 91.973,17.856 v1@96.977,22.86
  Bottom Layer w0.254: v1@97.231,22.86 U506.4@98.258,22.86
  Bottom Layer w1.016: U506.4@98.73,23.282 R515.1@100.337,23.282
  other v1: 97.028,22.86
NetR516_1: R516.1 U507.4 U509.3 | length 30.4
  Top Layer w0.254: U509.3@78.867,16.028 80.213,17.374 98.094,17.374 v1@103.581,22.86
  Bottom Layer w0.254: v1@103.581,22.856 U507.4@104.858,22.856
  Bottom Layer w1.016: U507.4@105.334,23.282 R516.1@106.941,23.282
  other v1: 103.632,22.86
NetR518_1: R518.1 U510.1 | length 2
  Bottom Layer w1.016: U510.1@111.557,16.211 R518.1@113.545,16.211
NetR519_1: R519.1 U511.1 | length 2
  Bottom Layer w1.016: U511.1@118.161,16.211 R519.1@120.149,16.211
NetR520_1: R520.1 U512.1 | length 2
  Bottom Layer w1.016: U512.1@124.765,16.211 R520.1@126.753,16.211
NetR521_1: R521.1 U513.1 | length 2
  Bottom Layer w1.016: U513.1@131.369,16.211 R521.1@133.357,16.211
NetR522_1: R522.1 U514.1 | length 2
  Bottom Layer w1.016: U514.1@137.973,16.211 R522.1@139.961,16.211
NetR523_1: R523.1 U515.1 | length 2
  Bottom Layer w1.016: U515.1@144.577,16.211 R523.1@146.565,16.211
NetR524_1: R524.1 U516.1 | length 2
  Bottom Layer w1.016: U516.1@151.181,16.211 R524.1@153.169,16.211
NetR525_1: R525.1 U517.1 | length 2
  Bottom Layer w1.016: U517.1@157.785,16.211 R525.1@159.773,16.211
NetR527_1: R527.1 U509.5 U510.4 | length 34.5
  Top Layer w0.254: U509.5@81.407,16.053 82.245,16.891 101.676,16.891 106.883,22.098 109.423,22.098 v1@110.185,22.86
  Bottom Layer w0.254: v1(110.236,22.86) 111.509,22.86 U510.4@111.513,22.856
  Bottom Layer w1.016: U510.4@111.938,23.282 R527.1@113.545,23.282
NetR528_1: R528.1 U511.4 U518.13 | length 5.1
  Top Layer w0.254: v1@116.789,23.368 116.789,22.352 117.272,21.869 U518.13@117.272,20.828
  Bottom Layer w0.254: v1@116.789,23.368 117.554,23.368
  Bottom Layer w1.016: U511.4@118.542,23.282 R528.1@120.149,23.282
  other v1: 116.84,23.368
NetR529_1: R529.1 U512.4 U518.11 | length 9.3
  Top Layer w0.254: U518.11@119.761,20.828 119.761,22.276 120.853,23.368 v1@123.393,23.368
  Bottom Layer w0.254: v1@123.393,23.368 123.905,22.856 124.164,22.856 124.67,23.361 U512.4@124.67,22.856
  Bottom Layer w1.016: U512.4@125.146,23.282 R529.1@126.753,23.282
  other v1: 123.444,23.368
NetR530_1: R530.1 U513.4 U518.9 | length 11
  Top Layer w0.254: U518.9@122.301,21.768 122.707,22.174 129.311,22.174 v1@129.997,22.86
  Bottom Layer w0.254: v1@129.997,22.86 130.001,22.856 U513.4@131.274,22.856
  Bottom Layer w1.016: U513.4@131.75,23.282 R530.1@133.357,23.282
  other v1: 130.048,22.86
NetR531_1: R531.1 U514.4 U518.1 | length 26.2
  Top Layer w0.254: U518.1@115.951,15.926 117.881,17.856 131.597,17.856 v1@136.601,22.86
  Bottom Layer w0.254: v1@136.855,22.86 U514.4@137.882,22.86
  Bottom Layer w1.016: U514.4@138.354,23.282 R531.1@139.961,23.282
  other v1: 136.652,22.86
NetR532_1: R532.1 U515.4 U518.3 | length 30.4
  Top Layer w0.254: U518.3@118.491,16.028 119.837,17.374 137.718,17.374 v1@143.205,22.86
  Bottom Layer w0.254: v1@143.205,22.856 U515.4@144.482,22.856
  Bottom Layer w1.016: U515.4@144.958,23.282 R532.1@146.565,23.282
  other v1: 143.256,22.86
NetR533_1: R533.1 U516.4 U518.5 | length 34.5
  Top Layer w0.254: U518.5@121.031,16.053 121.869,16.891 141.3,16.891 146.507,22.098 149.047,22.098 v1@149.809,22.86
  Bottom Layer w0.254: v1(149.86,22.86) 151.133,22.86 U516.4@151.137,22.856
  Bottom Layer w1.016: U516.4@151.562,23.282 R533.1@153.169,23.282
NetR534_1: R534.1 U517.4 U524.13 | length 5.8
  Top Layer w0.254: v1(156.464,23.368) 156.464,22.352 156.896,21.92 U524.13@156.896,20.828
  Bottom Layer w0.254: v1(156.464,23.368) 157.229,23.368 U517.4@157.741,22.856
  Bottom Layer w1.016: U517.4@158.166,23.282 R534.1@159.773,23.282
NetR536_1: R536.1 U519.1 | length 2
  Bottom Layer w1.016: U519.1@164.389,16.211 R536.1@166.377,16.211
NetR537_1: R537.1 U520.1 | length 2
  Bottom Layer w1.016: U520.1@170.993,16.211 R537.1@172.981,16.211
NetR538_1: R538.1 U521.1 | length 2
  Bottom Layer w1.016: U521.1@177.597,16.211 R538.1@179.585,16.211
NetR539_1: R539.1 U522.1 | length 2
  Bottom Layer w1.016: U522.1@184.201,16.211 R539.1@186.189,16.211
NetR540_1: R540.1 U523.1 | length 2
  Bottom Layer w1.016: U523.1@190.805,16.211 R540.1@192.793,16.211
NetR541_1: R541.1 U519.4 U524.11 | length 9.3
  Top Layer w0.254: U524.11@159.436,20.828 159.436,22.276 160.528,23.368 v1(163.068,23.368)
  Bottom Layer w0.254: v1(163.068,23.368) 163.58,22.856 163.84,22.856 164.345,23.361 U519.4@164.345,22.856
  Bottom Layer w1.016: U519.4@164.77,23.282 R541.1@166.377,23.282
NetR542_1: R542.1 U520.4 U524.9 | length 12
  Top Layer w0.254: U524.9@161.976,20.828 161.976,21.768 162.382,22.174 168.986,22.174 v1(169.672,22.86)
  Bottom Layer w0.254: v1(169.672,22.86) 169.676,22.856 U520.4@170.949,22.856
  Bottom Layer w1.016: U520.4@171.374,23.282 R542.1@172.981,23.282
NetR543_1: R543.1 U521.4 U524.1 | length 27.4
  Top Layer w0.254: U524.1@155.626,15.24 155.626,15.926 157.556,17.856 171.272,17.856 v1(176.276,22.86)
  Bottom Layer w0.254: v1@176.53,22.86 177.557,22.86 U521.4@177.978,23.282
  Bottom Layer w1.016: U521.4@177.978,23.282 R543.1@179.585,23.282
NetR544_1: R544.1 U522.4 U524.3 | length 31.9
  Top Layer w0.254: U524.3@158.166,14.554 U524.3@158.166,15.24 158.166,16.028 159.512,17.374 177.394,17.374 v1(182.88,22.86)
  Bottom Layer w0.254: v1@182.88,22.856 U522.4@184.157,22.856
  Bottom Layer w1.016: U522.4@184.582,23.282 R544.1@186.189,23.282
NetR545_1: R545.1 U523.4 U524.5 | length 37
  Top Layer w0.254: U524.5@160.706,14.554 U524.5@160.706,15.24 160.706,16.053 161.544,16.891 180.899,16.891 182.677,18.669 186.004,18.669 189.509,22.174 189.509,22.936 v1(189.484,22.962)
  Bottom Layer w0.254: v1(189.484,22.962) 190.655,22.962 U523.4@190.761,22.856 190.761,23.107 U523.4@190.641,22.987
  Bottom Layer w1.016: U523.4@191.186,23.282 R545.1@192.793,23.282
NetR608_1: R608.1 R609.2 U605.2 | length 6.3
  Top Layer w0.508: R608.1@15.621,8.128 17.907,10.414 R609.2@17.907,10.668 17.907,13.335 U605.2@17.78,13.462
NetR800_2: R800.2 U801.1 | length 2
  Bottom Layer w1.016: U801.1@42.469,19.857 R800.2@42.469,21.844
NetR801_1: R801.1 U803.1 | length 2.1
  Bottom Layer w1.016: U803.1@52.077,16.256 54.064,16.256 R801.1@54.109,16.211
NetR802_1: R802.1 U800.1 | length 2
  Bottom Layer w1.016: U800.1@42.469,13.253 R802.1@42.469,15.24
NetR803_2: R803.2 U802.1 | length 2
  Bottom Layer w1.016: U802.1@42.425,6.604 42.469,6.649 R803.2@42.469,8.634
NetR804_2: R804.2 U800.4 U804.11 | length 18
  Top Layer w0.254: v1(35.56,11.938) 34.036,11.938 33.528,12.446 33.528,16.764 34.239,17.475 36.525,17.475 39.041,19.991 U804.11@39.041,20.828
  Bottom Layer w0.254: U800.4@35.526,13.507 35.526,11.972 v1(35.56,11.938)
  Bottom Layer w1.016: R804.2@35.526,15.24 35.526,13.507 U800.4@35.825,13.208
NetR805_2: R805.2 U802.4 U804.9 | length 26
  Top Layer w0.254: v1(37.846,6.604) 37.846,11.43 36.322,12.954 35.052,12.954 33.96,14.046 33.96,16.585 34.418,17.043 36.704,17.043 38.913,19.253 40.843,19.253 41.581,19.991 U804.9@41.581,20.828
  Bottom Layer w0.254: U802.4@35.825,6.604 v1(37.846,6.604)
  Bottom Layer w1.016: U802.4@35.526,6.903 R805.2@35.526,8.634
NetR806_2: R806.2 U801.4 U804.13 | length 6.7
  Top Layer w0.254: v1(35.814,23.622) 36.501,22.935 U804.13@36.501,20.828
  Bottom Layer w0.254: R806.2@35.526,21.844 35.526,23.334 v1(35.814,23.622)
  Bottom Layer w1.016: U801.4@35.526,20.111 R806.2@35.526,21.844
NetR807_2: R807.2 U803.4 U804.3 | length 22.2
  Top Layer w0.254: U804.3@37.771,15.24 37.771,16.689 38.608,17.526 42.926,17.526 v1(43.688,18.288) ; v1(46.863,18.288) 46.863,22.225 47.498,22.86 v1(50.8,22.86)
  Bottom Layer w0.254: v1(43.688,18.288) v1(46.863,18.288) ; v1(50.8,22.86) 52.073,22.86 U803.4@52.077,22.856
  Bottom Layer w1.016: U803.4@52.502,23.282 R807.2@54.109,23.282
NetU2_3: U2.3
NetU2_7: U2.7
NetU3_2: U3.2
NetU3_5: U3.5
NetU3_7: U3.7
NetU3_15: U3.15
NetU3_16: U3.16
NetU3_36: U3.36
NetU3_39: U3.39
NetU3_41: U3.41
NetU3_42: U3.42
NetU3_43: U3.43
NetU3_44: U3.44
NetU3_45: U3.45
NetU3_46: U3.46
NetU3_73: U3.73
NetU508_2: U508.2
NetU508_4: U508.4
NetU508_6: U508.6
NetU804_2: U804.2
NetU804_6: U804.6
NRST: C19.1 D3.1 R7.1 U3.14 | length 9.4
  Top Layer w0.254: U3.14@19.387,43.436 20.907,43.436 21.438,43.967 v1(21.438,44.145)
  Bottom Layer w0.254: v1@21.593,43.989 22.25,43.332 D3.1@25.889,43.332 ; R7.1@25.508,40.538 D3.1@25.508,42.951